# Allegro board OLED_TFT_32F103_Allegro174.brd
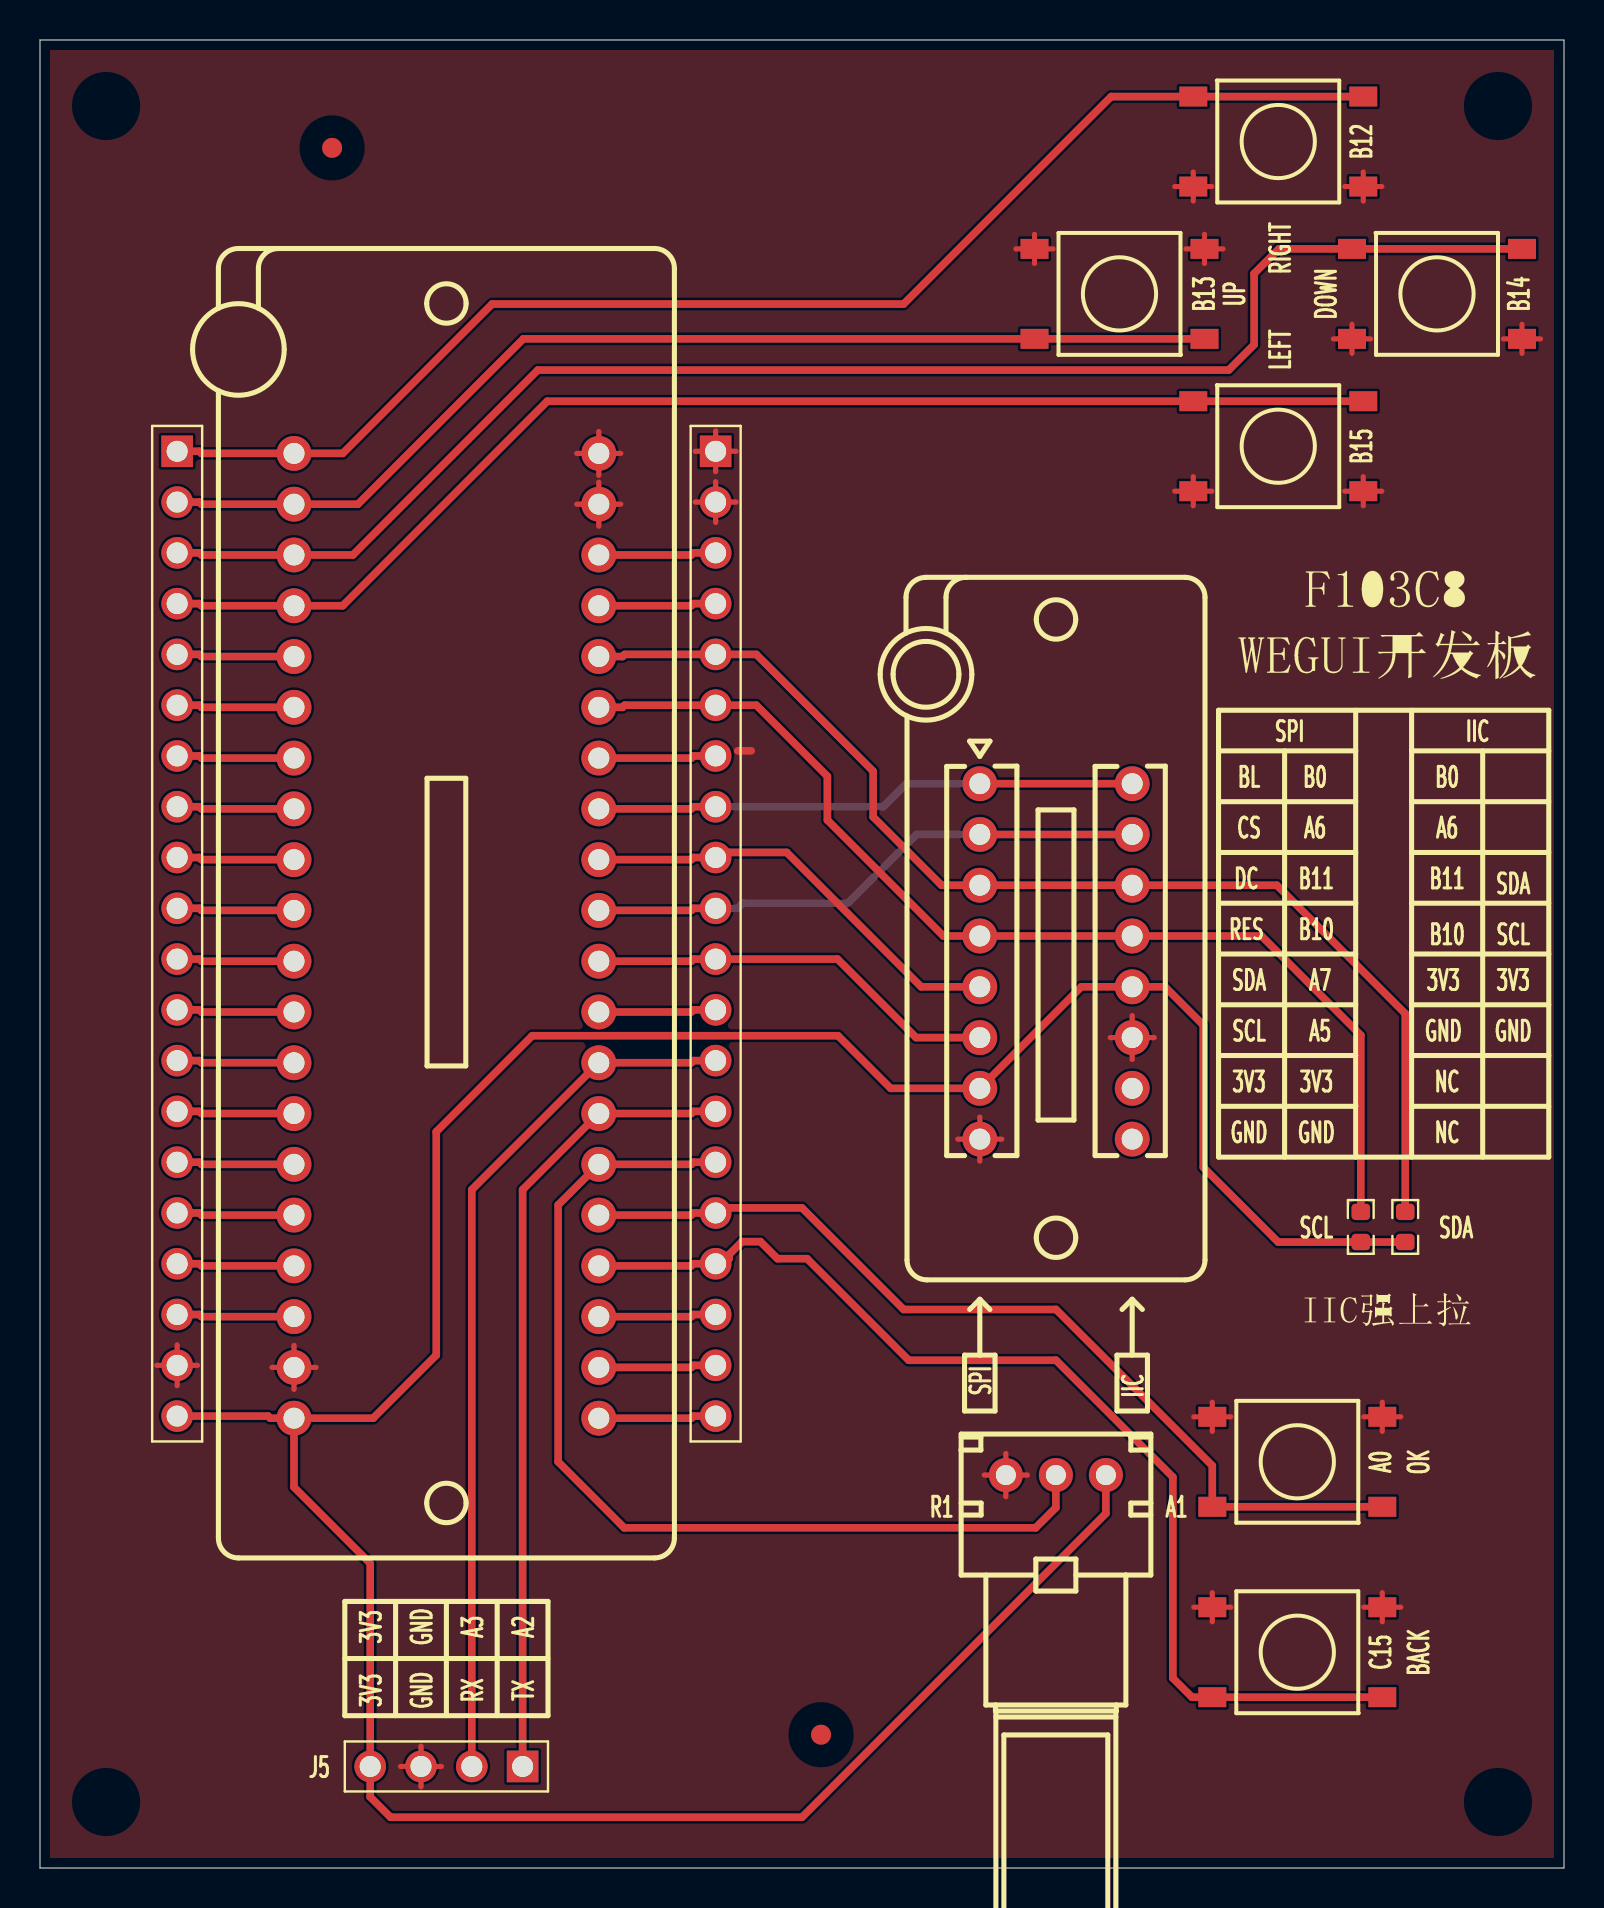
[diagram p0: board, top side]
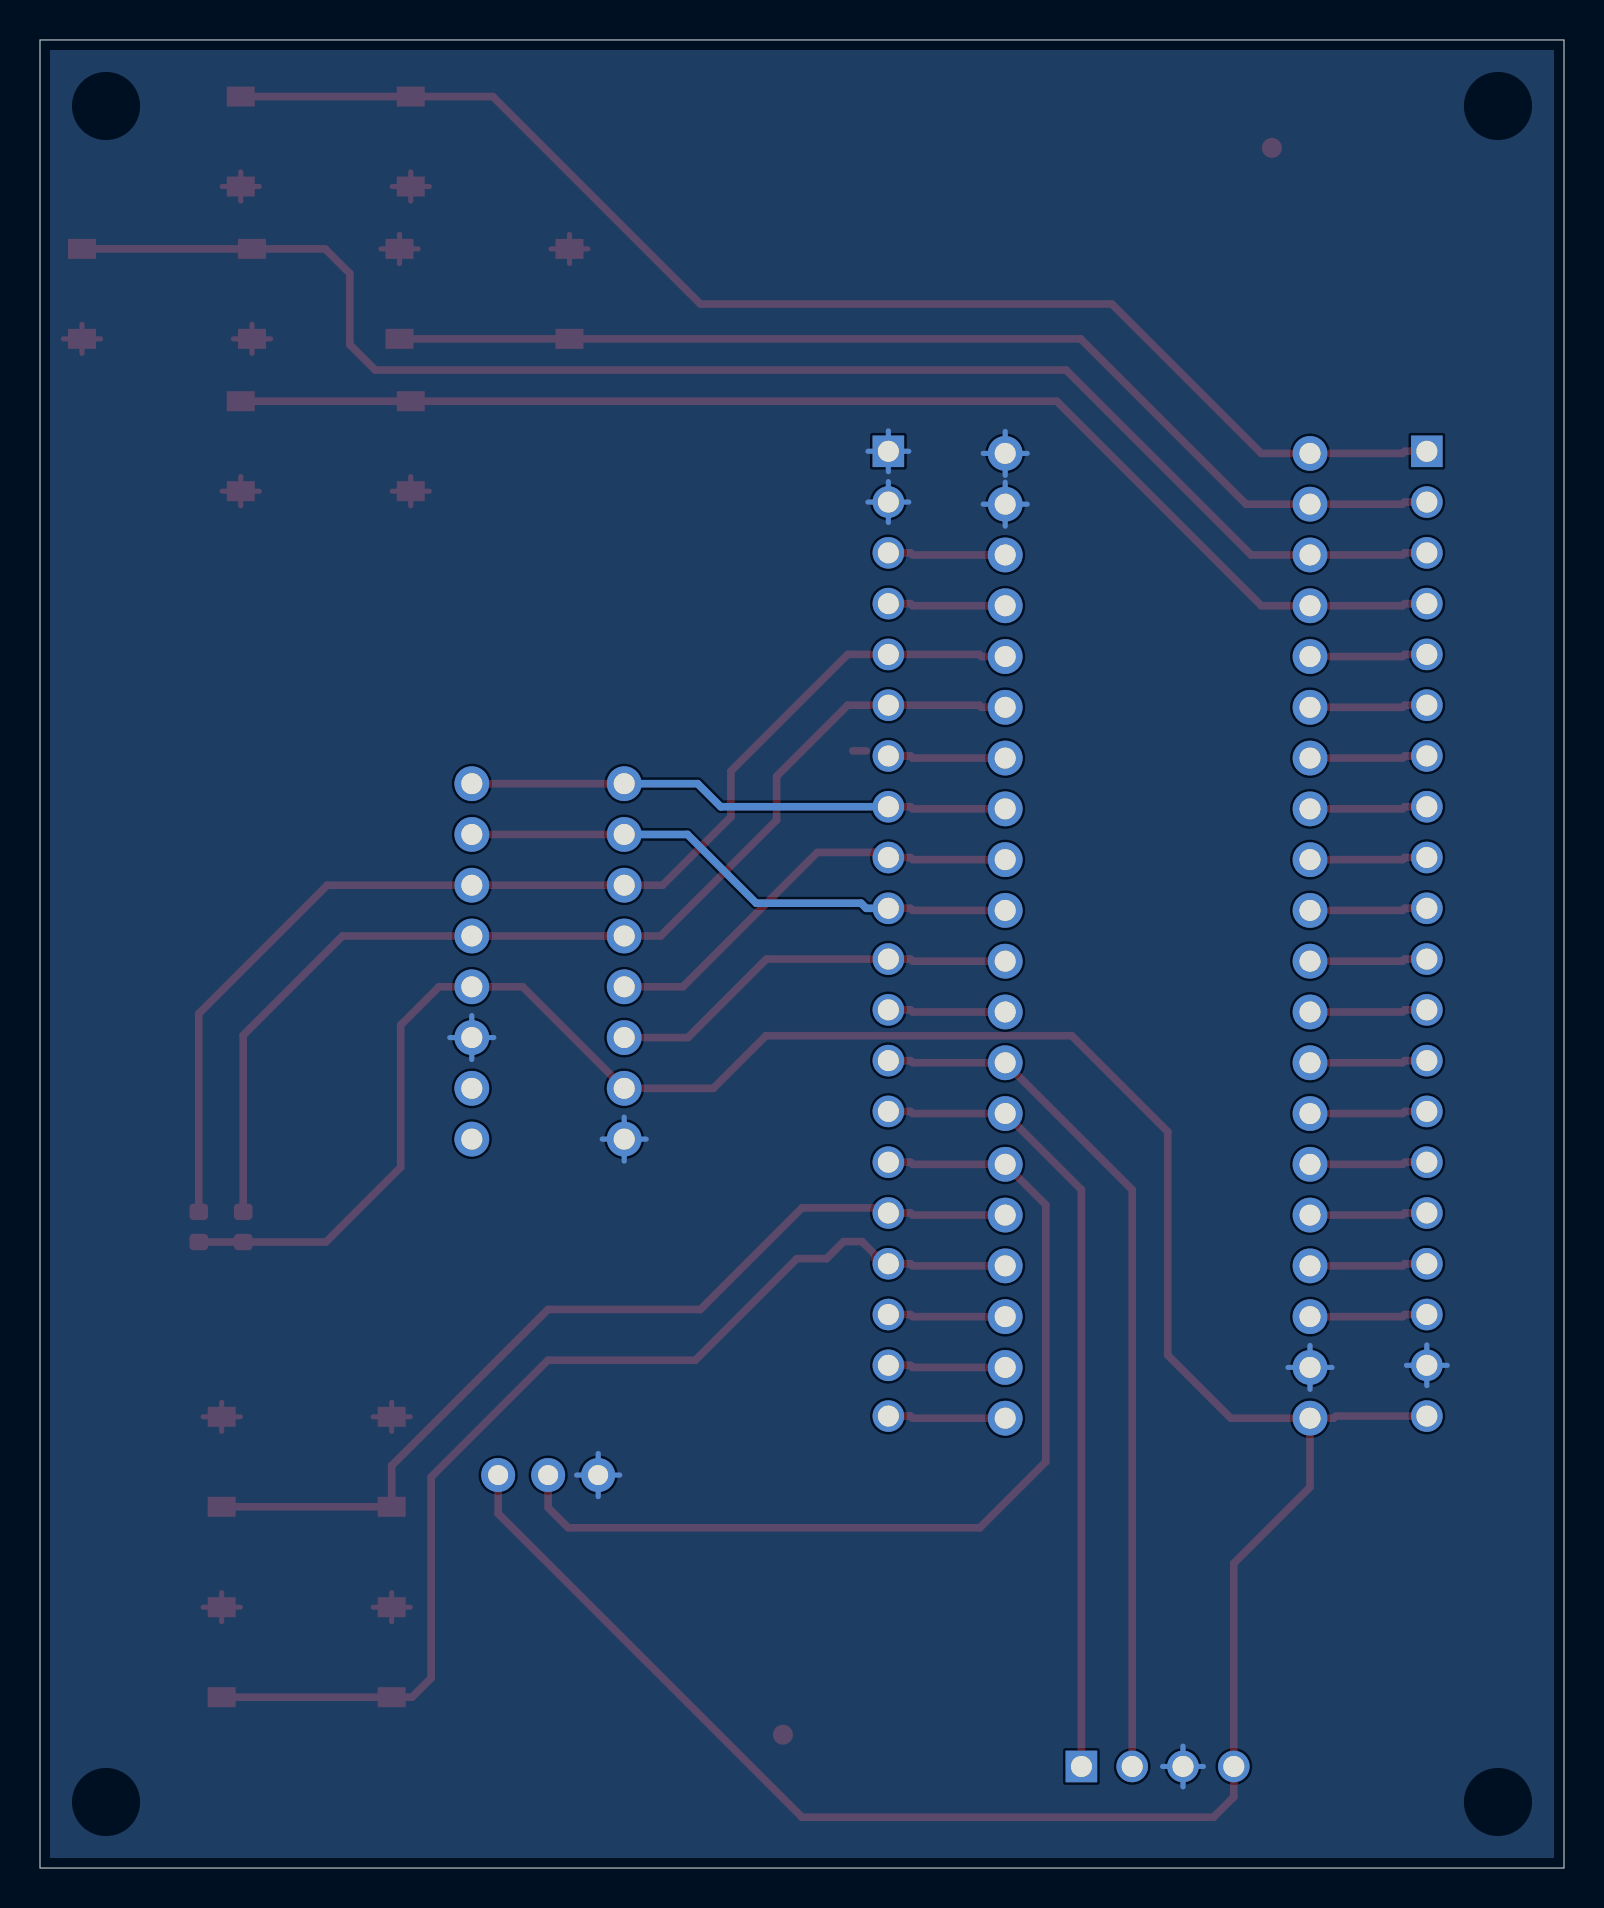
[diagram p1: board, bottom side, seen from below]

Outline 76.2 x 91.44 mm; copper layers: TOP, BOTTOM. Coordinates in mm from the lower left corner of the outline.
Outline path: 0,91.44 0,0 76.2,0 76.2,91.44 0,91.44

## Design rules (mm)
constraint set DEFAULT: min track width 0.203

## Placement (name value [footprint] x y rotation side)
J1  xx32F103x8  [IC_LOCKING_SEAT-P2R54-40P-PW7R1]  20.32 48.26 0 top
J2  HDR-1X20-2R54-TM-VM-(Au)  [HDR-1X20-2R54-TM-VM]  6.86 70.87 270 top
J3  HDR-1X20-2R54-TM-VM-(Au)  [HDR-1X20-2R54-TM-VM]  33.78 70.87 270 top
J4  OLED_TFT  [IC_LOCKING_SEAT-P2R54-16P-PW3R6]  50.8 46.99 0 top
J5  UART  [HDR-1X4-2R54-TM-VM]  24.13 5.08 180 top
NOREF  -  [unnamed]  72.9 88.14 0 top
NOREF#2  -  [unnamed#2]  39.05 6.67 0 top
NOREF#3  -  [unnamed]  3.3 88.14 0 top
NOREF#4  -  [#2]  67.31 60.71 0 top
NOREF#5  -  [#2]  67.31 64.01 0 top
NOREF#6  -  [unnamed]  3.3 3.3 0 top
NOREF#7  -  [#2]  67.31 27.94 0 top
NOREF#8  -  [unnamed]  72.9 3.3 0 top
NOREF#9  -  [unnamed#2]  14.61 86.04 0 top
R1  B10K  [R-ADJ-RK097N-L20-SHAPE_F_TYPE]  50.79 14.65 180 top
R2  1k/nc  [R-0603-FENGHUA]  68.26 32.07 270 top
R3  1k/nc  [R-0603-FENGHUA]  66.04 32.07 270 top
SW1  6x6x6-SM  [KEY-4-6X6X6-SM-V]  61.91 71.12 180 top
SW2  6x6x6-SM  [KEY-4-6X6X6-SM-V]  53.98 78.74 0 top
SW3  6x6x6-SM  [KEY-4-6X6X6-SM-V]  61.91 86.36 180 top
SW4  6x6x6-SM  [KEY-4-6X6X6-SM-V]  69.85 78.74 180 top
SW5  6x6x6-SM  [KEY-4-6X6X6-SM-V]  62.87 10.79 0 top
SW6  6x6x6-SM  [KEY-4-6X6X6-SM-V]  62.87 20.32 0 top

## Library data of the parts
J1 = IC-LOCKING-SEAT-40P_2
J2 J3 = CON20
J4 = IC-LOCKING-SEAT-16P_1
J5 = CON4
R1 = RES-ADJ-RK097N
R2 R3 = R2
SW1-SW6 = SW PUSHBUTTON-SPST-2

## Footprints (pads in the part's own frame, mm; a bottom-side part is the same pattern mirrored in y, then rotated)
HDR-1X4-2R54-TM-VM
  rect 1.58x1.58 hole 1.05: 1(0,0)
  round 1.58 hole 1.05: 2(2.54,0) 3(5.08,0) 4(7.62,0)
HDR-1X20-2R54-TM-VM
  rect 1.58x1.58 hole 1.05: 1(0,0)
  round 1.58 hole 1.05: 2(2.54,0) 3(5.08,0) 4(7.62,0) 5(10.16,0) 6(12.7,0) 7(15.24,0) 8(17.78,0) 9(20.32,0) 10(22.86,0) 11(25.4,0) 12(27.94,0) 13(30.48,0) 14(33.02,0) 15(35.56,0) 16(38.1,0) 17(40.64,0) 18(43.18,0) 19(45.72,0) 20(48.26,0)
IC_LOCKING_SEAT-P2R54-16P-PW3R6
  round 1.74 hole 1.05: 1(-3.81,7.25) 2(-3.81,4.71) 3(-3.81,2.17) 4(-3.81,-0.37) 5(-3.81,-2.91) 6(-3.81,-5.45) 7(-3.81,-7.99) 8(-3.81,-10.53) 9(3.81,-10.53) 10(3.81,-7.99) 11(3.81,-5.45) 12(3.81,-2.91) 13(3.81,-0.37) 14(3.81,2.17) 15(3.81,4.71) 16(3.81,7.25)
IC_LOCKING_SEAT-P2R54-40P-PW7R1
  round 1.74 hole 1.05: 1(-7.62,22.5) 2(-7.62,19.96) 3(-7.62,17.42) 4(-7.62,14.88) 5(-7.62,12.34) 6(-7.62,9.8) 7(-7.62,7.26) 8(-7.62,4.72) 9(-7.62,2.18) 10(-7.62,-0.36) 11(-7.62,-2.9) 12(-7.62,-5.44) 13(-7.62,-7.98) 14(-7.62,-10.52) 15(-7.62,-13.06) 16(-7.62,-15.6) 17(-7.62,-18.14) 18(-7.62,-20.68) 19(-7.62,-23.22) 20(-7.62,-25.76) 21(7.62,-25.76) 22(7.62,-23.22) 23(7.62,-20.68) 24(7.62,-18.14) 25(7.62,-15.6) 26(7.62,-13.06) 27(7.62,-10.52) 28(7.62,-7.98) 29(7.62,-5.44) 30(7.62,-2.9) 31(7.62,-0.36) 32(7.62,2.18) 33(7.62,4.72) 34(7.62,7.26) 35(7.62,9.8) 36(7.62,12.34) 37(7.62,14.88) 38(7.62,17.42) 39(7.62,19.96) 40(7.62,22.5)
KEY-4-6X6X6-SM-V
  rect 1.4x1 smd: 1(-4.25,2.25) 2(4.25,2.25) 3(-4.25,-2.25) 4(4.25,-2.25)
R-0603-FENGHUA
  custom 0.82x0.929 smd: 1(-0.755,0) 2(0.755,0)
R-ADJ-RK097N-L20-SHAPE_F_TYPE
  round 1.7 hole 1: 1(2.501,-5.001) 2(0,-5.001) 3(-2.501,-5.001)
unnamed
  round 0 hole 3 unplated: (0,0)
unnamed#2
  round 1 smd: (0,0)

## Nets
3V3: J1.20 J2.20 J4.7 J4.12 J5.4 R1.3 R2.2 R3.2
GND: J1.19 J1.39 J1.40 J2.19 J3.1 J3.2 J4.8 J4.11 J5.3 R1.1 SW1.1 SW1.2 SW2.1 SW2.2 SW3.1 SW3.2 SW4.1 SW4.2 SW5.1 SW5.2 SW6.1 SW6.2
K1: J1.24 J3.17 SW5.3 SW5.4
K2: J1.25 J3.16 SW6.3 SW6.4
K3: J1.4 J2.4 SW1.3 SW1.4
K4: J1.2 J2.2 SW2.3 SW2.4
K5: J1.1 J2.1 SW3.3 SW3.4
K6: J1.3 J2.3 SW4.3 SW4.4
LCD_BL: J1.33 J3.8 J4.1 J4.16
LCD_CS: J1.31 J3.10 J4.2 J4.15
LCD_DC: J1.36 J3.5 J4.3 J4.14 R2.1
LCD_IIC_SCL: J1.35 J3.6 J4.4 J4.13 R3.1
LCD_SPI_SCL: J1.30 J3.11 J4.6
LCD_SPI_SDA: J1.32 J3.9 J4.5
R_ADJ: J1.26 J3.15 R1.2
USART1_RX: J1.28 J3.13 J5.2
USART1_TX: J1.27 J3.14 J5.1
N18242: J1.5 J2.5
N18244: J1.6 J2.6
N18246: J1.7 J2.7
N18248: J1.8 J2.8
N18250: J1.9 J2.9
N18252: J1.10 J2.10
N18254: J1.11 J2.11
N18256: J1.12 J2.12
N18258: J1.13 J2.13
N18260: J1.14 J2.14
N18262: J1.15 J2.15
N18264: J1.16 J2.16
N18266: J1.17 J2.17
N18268: J1.18 J2.18
N18396: J1.38 J3.3
N18398: J1.37 J3.4
N18404: J1.34 J3.7
N18414: J1.29 J3.12
N18426: J1.23 J3.18
N18428: J1.22 J3.19
N18430: J1.21(VB) J3.20

Pads without a net: J4 9 10

## Routing (per net, layer and track width the routed paths; a pad name or vN(x,y) marks a point on that pad's centre or on a via; arc(x,y) is an arc through that point)
3V3: length 154.5
  TOP w0.381: J1.20 16.66,22.5 19.81,25.65 19.81,36.83 24.61,41.63 39.9,41.63 42.53,39 J4.7 52.07,44.08 J4.12 56.25,44.08 58.17,42.16 58.17,35.05 61.91,31.31 R3.2 R2.2 ; J1.20 11.51,22.5 11.41,22.61 J2.20 ; J1.20 12.7,19.05 16.51,15.24 J5.4 16.51,3.56 17.53,2.54 38.1,2.54 53.29,17.73 R1.3
GND: length 125.6
  TOP w0.254: SW3.2 58.59,84.11 ; SW3.2 57.66,84.84 ; SW3.2 56.73,84.11 ; SW3.2 57.66,83.38 ; 73.17,76.49 SW4.1 ; SW4.1 75.03,76.49 ; SW4.1 74.1,77.22 ; SW4.1 74.1,75.76 ; 6.86,24.13 J2.19 ; J2.19 7.88,25.15 ; J2.19 5.84,25.15 ; J2.19 6.86,26.16 ; 32.76,70.87 J3.1 ; J3.1 34.8,70.87 ; J3.1 33.78,71.88 ; J3.1 33.78,69.85 ; SW5.2 67.12,13.77 ; SW5.2 67.12,12.32 ; SW5.2 66.19,13.04 ; SW5.2 68.04,13.04 ; J4.11 54.61,42.64 ; J4.11 55.71,41.54 ; J4.11 53.51,41.54 ; J4.11 54.61,40.44 ; 27.94,67.12 J1.39 ; J1.39 29.04,68.22 ; J1.39 27.94,69.32 ; J1.39 26.84,68.22 ; 49.72,80.99 50.65,80.99 ; 49.72,80.99 48.8,80.99 ; 49.72,80.99 49.72,81.72 ; 49.72,80.99 49.72,80.26 ; 67.12,21.84 SW6.2 ; SW6.2 67.12,23.3 ; SW6.2 66.19,22.57 ; SW6.2 68.04,22.57 ; 66.16,83.38 SW3.1 ; SW3.1 65.23,84.11 ; SW3.1 67.09,84.11 ; SW3.1 66.16,84.84 ; 48.29,18.58 R1.1 ; R1.1 49.37,19.66 ; R1.1 47.21,19.66 ; R1.1 48.29,20.73 ; SW1.1 66.16,69.6 ; SW1.1 65.23,68.87 ; SW1.1 66.16,68.14 ; SW1.1 67.09,68.87 ; 65.6,75.76 SW4.2 ; SW4.2 65.6,77.22 ; SW4.2 66.53,76.49 ; SW4.2 64.67,76.49 ; SW1.2 57.66,69.6 ; SW1.2 57.66,68.14 ; SW1.2 58.59,68.87 ; SW1.2 56.73,68.87 ; J3.2 34.8,68.33 ; J3.2 32.76,68.33 ; J3.2 33.78,69.34 ; J3.2 33.78,67.31 ; 58.62,12.32 SW5.1 ; SW5.1 58.62,13.77 ; SW5.1 57.69,13.04 ; SW5.1 59.54,13.04 ; SW6.1 59.54,22.57 ; SW6.1 58.62,21.84 ; SW6.1 58.62,23.3 ; SW6.1 57.69,22.57 ; 57.3,80.99 SW2.2 ; SW2.2 58.23,81.72 ; SW2.2 58.23,80.26 ; SW2.2 59.15,80.99 ; 27.94,69.66 J1.40 ; J1.40 27.94,71.86 ; J1.40 26.84,70.76 ; J1.40 29.04,70.76 ; 18.03,5.08 J5.3 ; J5.3 20.07,5.08 ; J5.3 19.05,4.06 ; J5.3 19.05,6.1 ; J4.8 46.99,37.56 ; J4.8 48.09,36.46 ; J4.8 46.99,35.36 ; J4.8 45.89,36.46 ; J1.19 13.8,25.04 ; J1.19 11.6,25.04 ; J1.19 12.7,26.14 ; J1.19 12.7,23.94
  TOP w0.381: 35.56,55.88 34.89,55.88
  BOTTOM w0.254: J1.40 29.04,70.76 ; J1.40 27.94,71.86 ; J1.40 27.94,69.66 ; J1.40 26.84,70.76 ; J1.39 29.04,68.22 ; J1.39 26.84,68.22 ; J1.39 27.94,67.12 ; J1.39 27.94,69.32 ; J4.11 54.61,42.64 ; J4.11 53.51,41.54 ; J4.11 54.61,40.44 ; J4.11 55.71,41.54 ; 46.99,35.36 J4.8 ; J4.8 46.99,37.56 ; J4.8 48.09,36.46 ; J4.8 45.89,36.46 ; 12.7,23.94 J1.19 ; J1.19 13.8,25.04 ; J1.19 12.7,26.14 ; J1.19 11.6,25.04 ; R1.1 48.29,20.73 ; R1.1 48.29,18.58 ; R1.1 47.21,19.66 ; R1.1 49.37,19.66 ; J2.19 7.88,25.15 ; J2.19 5.84,25.15 ; J2.19 6.86,26.16 ; J2.19 6.86,24.13 ; 33.78,67.31 J3.2 ; J3.2 34.8,68.33 ; J3.2 32.76,68.33 ; J3.2 33.78,69.34 ; J3.1 33.78,71.88 ; J3.1 32.76,70.87 ; J3.1 34.8,70.87 ; J3.1 33.78,69.85 ; 19.05,4.06 J5.3 ; J5.3 20.07,5.08 ; J5.3 18.03,5.08 ; J5.3 19.05,6.1
K1: length 54.9
  TOP w0.381: J1.24 32.57,30.12 32.67,30.23 J3.17 ; 34.09,30.12 34.45,30.48 34.45,30.68 35.1,31.33 36.02,31.33 36.87,30.48 38.35,30.48 43.43,25.4 50.8,25.4 56.64,19.56 56.64,9.5 57.6,8.54 SW5.3 SW5.4
K2: length 46.5
  TOP w0.381: SW6.4 SW6.3 58.62,20.12 50.8,27.94 43.18,27.94 38.1,33.02 34.45,33.02 34.09,32.66 ; J1.25 32.57,32.66 32.67,32.77 J3.16
K3: length 63.6
  TOP w0.381: J2.4 7.97,63.25 8.07,63.14 J1.4 15.13,63.14 25.36,73.37 SW1.4 SW1.3
K4: length 54.8
  TOP w0.381: J2.2 7.97,68.33 8.07,68.22 J1.2 15.9,68.22 24.17,76.49 SW2.4
K5: length 66.7
  TOP w0.381: J2.1 7.97,70.87 8.07,70.76 J1.1 15.13,70.76 22.61,78.23 43.18,78.23 53.56,88.61 SW3.4 SW3.3
K6: length 75.7
  TOP w0.381: SW4.3 SW4.4 61.94,80.99 60.71,79.76 60.71,76.2 59.44,74.93 24.89,74.93 15.64,65.68 J1.3 8.07,65.68 7.97,65.79 J2.3
LCD_BL: length 27.2
  TOP w0.381: J1.33 32.57,52.98 32.67,53.09 J3.8 ; J4.1 J4.16
  BOTTOM w0.381: J3.8 42.16,53.09 43.32,54.24 J4.1
LCD_CS: length 28.2
  TOP w0.381: J3.10 32.67,48.01 32.57,47.9 J1.31 ; J4.2 J4.15
  BOTTOM w0.381: J3.10 34.89,48.01 35.14,48.26 40.39,48.26 43.83,51.7 J4.2
LCD_DC: length 59.1
  TOP w0.381: R2.1 68.26,42.74 61.84,49.16 J4.14 J4.3 45.07,49.16 41.66,52.58 41.66,54.86 35.81,60.71 J3.5 29.23,60.71 29.13,60.6 J1.36
LCD_IIC_SCL: length 55.1
  TOP w0.381: J1.35 29.13,58.06 29.23,58.17 J3.6 35.81,58.17 39.37,54.61 39.37,52.42 45.17,46.62 J4.4 J4.13 61.08,46.62 66.04,41.66 R3.1
LCD_SPI_SCL: length 20.7
  TOP w0.381: J1.30 32.57,45.36 32.67,45.47 J3.11 39.88,45.47 43.8,41.54 J4.6
LCD_SPI_SDA: length 21.7
  TOP w0.381: J3.9 32.67,50.55 32.57,50.44 J1.32 ; 34.09,50.44 34.45,50.8 37.34,50.8 44.06,44.08 J4.5
R_ADJ: length 49.9
  TOP w0.381: J3.15 32.67,35.31 32.57,35.2 J1.26 25.91,33.17 25.91,20.32 29.21,17.02 49.78,17.02 50.79,18.03 R1.2
USART1_RX: length 43.7
  TOP w0.381: J3.13 32.67,40.39 32.57,40.28 J1.28 21.59,33.93 J5.2
USART1_TX: length 40.1
  TOP w0.381: J5.1 24.13,33.93 J1.27 32.57,37.74 32.67,37.85 J3.14
N18242: length 5.9
  TOP w0.381: J1.5 8.07,60.6 7.97,60.71 J2.5
N18244: length 5.9
  TOP w0.381: J2.6 7.97,58.17 8.07,58.06 J1.6
N18246: length 5.9
  TOP w0.381: J2.7 7.97,55.63 8.07,55.52 J1.7
N18248: length 5.9
  TOP w0.381: J2.8 7.97,53.09 8.07,52.98 J1.8
N18250: length 5.9
  TOP w0.381: J1.9 8.07,50.44 7.97,50.55 J2.9
N18252: length 5.9
  TOP w0.381: J1.10 8.07,47.9 7.97,48.01 J2.10
N18254: length 5.9
  TOP w0.381: J2.11 7.97,45.47 8.07,45.36 J1.11
N18256: length 5.9
  TOP w0.381: J2.12 7.97,42.93 8.07,42.82 J1.12
N18258: length 5.9
  TOP w0.381: J2.13 7.97,40.39 8.07,40.28 J1.13
N18260: length 5.9
  TOP w0.381: J2.14 7.97,37.85 8.07,37.74 J1.14
N18262: length 5.9
  TOP w0.381: J1.15 8.07,35.2 7.97,35.31 J2.15
N18264: length 5.9
  TOP w0.381: J1.16 8.07,32.66 7.97,32.77 J2.16
N18266: length 5.9
  TOP w0.381: J1.17 8.07,30.12 7.97,30.23 J2.17
N18268: length 5.9
  TOP w0.381: J2.18 7.97,27.69 8.07,27.58 J1.18
N18396: length 5.9
  TOP w0.381: J1.38 32.57,65.68 32.67,65.79 J3.3
N18398: length 5.9
  TOP w0.381: J3.4 32.67,63.25 32.57,63.14 J1.37
N18404: length 5.9
  TOP w0.381: J3.7 32.67,55.63 32.57,55.52 J1.34
N18414: length 5.9
  TOP w0.381: J3.12 32.67,42.93 32.57,42.82 J1.29
N18426: length 5.9
  TOP w0.381: J3.18 32.67,27.69 32.57,27.58 J1.23
N18428: length 5.9
  TOP w0.381: J1.22 32.57,25.04 32.67,25.15 J3.19
N18430: length 5.9
  TOP w0.381: J1.21 32.57,22.5 32.67,22.61 J3.20

## Copper pours and planes (outline as drawn; the poured copper is in the pictures)
GND on TOP, BOTTOM: 0.5,0.5 75.7,0.5 75.7,90.94 0.5,90.94

## Text on the board
Ref Des/Silkscreen Top: A1 | DC | RES | BL | CS | SDA | SCL | 3V3 | GND | SPI | B0 | A6 | B11 | B10 | A7 | A5 | NC | IIC | A3 | RX | A2 | TX | B13 | UP | RIGHT | LEFT | DOWN | B12 | B15 | A0 | C15 | OK | BACK | B14
NCLEGEND-1-2: FIGURE | FINISHED_SIZE | 1.0 | 1.05 | 3.0 | DRILL CHART: TOP to BOTTOM | ALL UNITS ARE IN MILLIMETERS | PLATED | NON-PLATED | QTY | 3 | 56 | 44 | 4
